# EAGLE board PCB v140 (EAGLE 9.7.0)
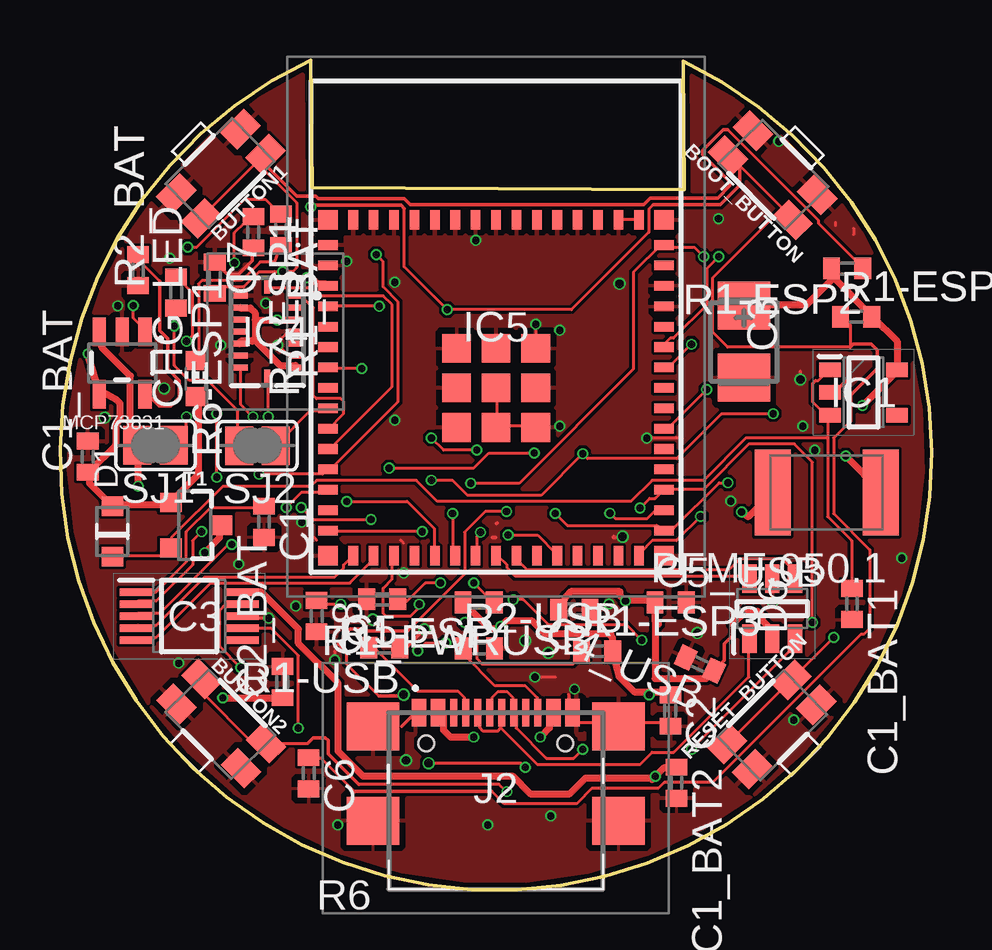
[diagram p0: board, top side]
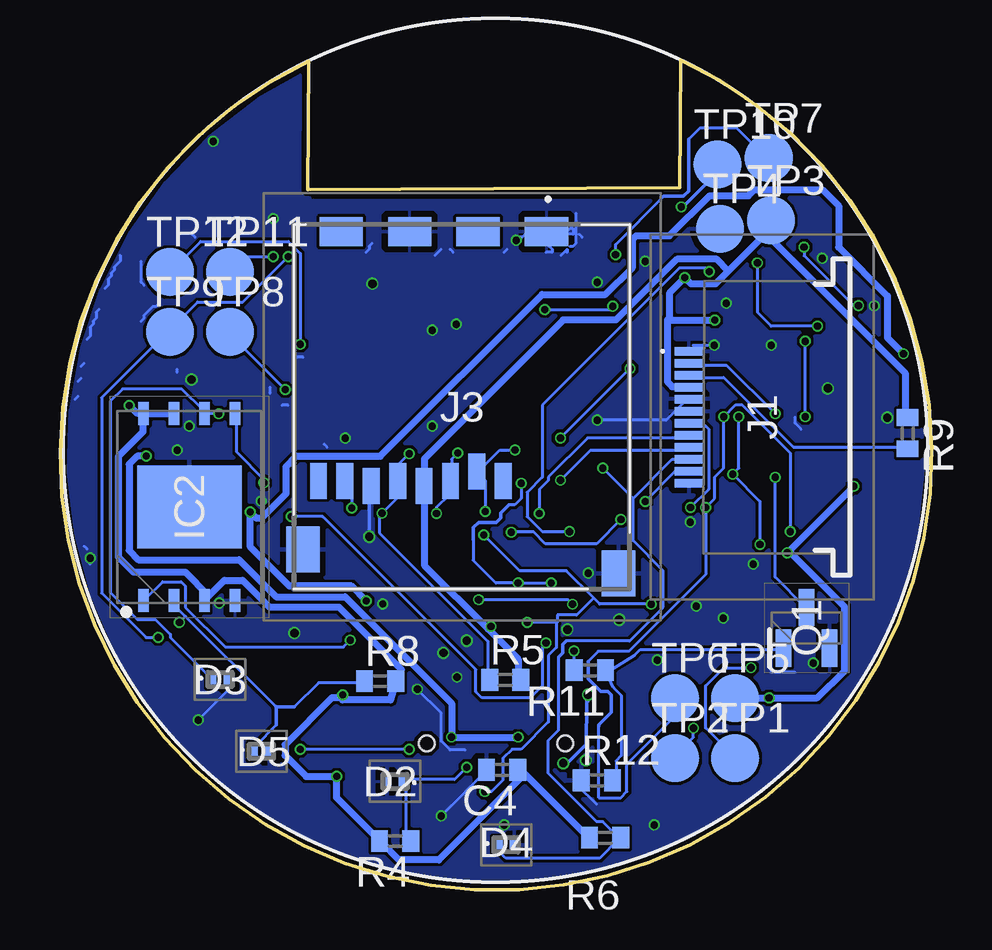
[diagram p1: board, bottom side, seen from below]

Size 36.33 x 34.59 mm. Coordinates in mm from the lower left corner, seen from the top.
Outline: 25.96,34.55 arc-309 10.46,34.59 10.51,29.27 26.01,29.19 25.96,34.55
Copper layers (1*16): Top / Bottom
Stack-up Default Layer Stack: Top User Defined 0.035mm / Dielectric-1 User Defined 1.6mm / Bottom User Defined 0.035mm
Design rules: minimum copper width 0.125mm, minimum drill size 0.3mm, copper clearance wire_polygon to wire_polygon 5mil, copper clearance wire_polygon to pad_smd 5mil, copper clearance wire_polygon to via 5mil, copper clearance pad_smd to pad_smd 5mil, copper clearance pad_smd to via 5mil, copper clearance via to via 5mil, copper clearance smd to pad (same net) 5mil, copper clearance smd to via (same net) 5mil, copper clearance smd to smd (same net) 5mil, dimension clearance 0.2mm, via restrict clearance 0mil, restrict clearance 0mil, drill distance 6mil, keepout clearance 0mil

## Footprints (pad centres in the part's own frame; a part is rotated, then mirrored left to right if it is on the bottom)
SPARKFUN-SWITCHES_TACTILE_SWITCH_SMD_4.6X2.8MM = smd 1.4 x 1: 1 -1.919,-0.571; 2 1.872,-0.571; 3 1.872,0.902; 4 -1.919,0.902
EAGLE-LTSPICE_C0402 = smd 0.7 x 0.9: 1 -0.65,0; 2 0.65,0
CT3528 = smd 2 x 2.2: + -1.5,0; - 1.5,0
ADAFRUIT_CHIP-LED0603 = smd 0.8 x 0.8: A 0,-0.75; C 0,0.75
AVX---SD0805S020S1R0_AVX_SD0805S020S1R0_0 = smd 0.8 x 0.9: 1 -1.05,0; 2 1.05,0
PESD5V0S1BL315 = smd 0.4 x 0.7: 1 -0.35,0; 2 0.35,0
SOT95P280X145-6N = smd 1.2 x 0.6: 1 -1.25,0.95; 2 -1.25,0; 3 -1.25,-0.95; 4 1.25,-0.95; 5 1.25,0; 6 1.25,0.95
SOT95P280X120-5N = smd 0.9 x 0.6: 1 -1.4,0.95; 2 -1.4,0; 3 -1.4,-0.95; 4 1.4,-0.95; 5 1.4,0.95
SON127P800X600X80-9N = smd 0.95 x 0.45: 1 -3.9,1.905; 2 -3.9,0.635; 3 -3.9,-0.635; 4 -3.9,-1.905; 5 3.9,-1.905; 6 3.9,-0.635; 7 3.9,0.635; 8 3.9,1.905 | smd 3.45 x 4.35: 9 0,0
SOP50P490X110-10N = smd 1.4 x 0.3: 1 -2.2,1; 2 -2.2,0.5; 3 -2.2,0; 4 -2.2,-0.5; 5 -2.2,-1; 6 2.2,-1; 7 2.2,-0.5; 8 2.2,0; 9 2.2,0.5; 10 2.2,1
BMI085 = smd 0.675 x 0.25: 1 1.165,1.5; 2 1.165,1; 3 1.165,0.5; 4 1.165,0; 5 1.165,-0.5; 6 1.165,-1; 7 1.165,-1.5; 9 -1.165,-1.5; 10 -1.165,-1; 11 -1.165,-0.5; 12 -1.165,0; 13 -1.165,0.5; 14 -1.165,1; 15 -1.165,1.5 | smd 0.25 x 0.675: 8 0,-1.915; 16 0,1.915
MY-ESP = smd 0.8 x 0.4: 1 -7,5.95; 2 -7,5.1; 3 -7,4.25; 4 -7,3.4; 5 -7,2.55; 6 -7,1.7; 7 -7,0.85; 8 -7,0; 9 -7,-0.85; 10 -7,-1.7; 11 -7,-2.55; 12 -7,-3.4; 13 -7,-4.25; 14 -7,-5.1; 15 -7,-5.95; 31 7,-5.95; 32 7,-5.1; 33 7,-4.25; 34 7,-3.4; 35 7,-2.55; 36 7,-1.7; 37 7,-0.85; 38 7,0; 39 7,0.85; 40 7,1.7; 41 7,2.55; 42 7,3.4; 43 7,4.25; 44 7,5.1; 45 7,5.95 | smd 0.4 x 0.8: 16 -5.95,-7; 17 -5.1,-7; 18 -4.25,-7; 19 -3.4,-7; 20 -2.55,-7; 21 -1.7,-7; 22 -0.85,-7; 23 0,-7; 24 0.85,-7; 25 1.7,-7; 26 2.55,-7; 27 3.4,-7; 28 4.25,-7; 29 5.1,-7; 30 5.95,-7; 46 5.95,7; 47 5.1,7; 48 4.25,7; 49 3.4,7; 50 2.55,7; 51 1.7,7; 52 0.85,7; 53 0,7; 54 -0.85,7; 55 -1.7,7; 56 -2.55,7; 57 -3.4,7; 58 -4.25,7; 59 -5.1,7; 60 -5.95,7 | smd 1.2 x 1.2: 61 0,0; 66 -1.65,1.65; 67 -1.65,0; 68 -1.65,-1.65; 69 0,-1.65; 70 1.65,-1.65; 71 1.65,0; 72 1.65,1.65; 73 0,1.65 | smd 0.8 x 0.8: 62 -7,7; 63 -7,-7; 64 7,-7; 65 7,7
PCA6LA12HL3TR = smd 0.35 x 1.2: 1 -2.75,-3.65; 2 -2.25,-3.65; 3 -1.75,-3.65; 4 -1.25,-3.65; 5 -0.75,-3.65; 6 -0.25,-3.65; 7 0.25,-3.65; 8 0.75,-3.65; 9 1.25,-3.65; 10 1.75,-3.65; 11 2.25,-3.65; 12 2.75,-3.65
MY-USB = smd 0.3 x 1.15: A1 -3.35,3.678; A4 -2.55,3.678; A5 -1.25,3.678; A6 -0.25,3.678; A7 0.25,3.678; A8 1.25,3.678; A9 2.55,3.678; A12 3.35,3.678; B1 3.05,3.678; B4 2.25,3.678; B5 1.75,3.678; B6 0.75,3.678; B7 -0.75,3.678; B8 -1.75,3.678; B9 -2.25,3.678; B12 -3.05,3.678 | smd 2.18 x 2: MP1 -5.11,-0.827; MP2 5.11,-0.827; MP3 -5.11,3.103; MP4 5.11,3.103 | hole 0.65: -2.89,2.403; 2.89,2.403
112ATAARR03ATTEND = smd 1.8 x 1.2: G1 10.6,10.4; G2 4.9,10.4; S1 7.75,10.4; S2 2.05,10.4 | smd 1.4 x 1.9: G3 13.6,-3.85; G4 0.45,-2.85 | smd 0.7 x 1.5: P1 8.8,0; P2 7.7,0.4; P3 6.6,0; P4 5.5,-0.2; P5 4.4,0; P6 3.3,-0.2; P7 2.2,0; P8 1.1,0
SPARKFUN-IC-POWER_SOT23-5 = smd 0.55 x 1.2: 1 -0.95,-1.3; 2 0,-1.3; 3 0.95,-1.3; 4 0.95,1.3; 5 -0.95,1.3
VARISTOR_CT/CN1812 = smd 1.5 x 3.6: 1 -2.25,0; 2 2.25,0
SOT96P240X120-3N = smd 1.55 x 0.65: 1 -0.85,0.96; 2 -0.85,-0.96; 3 0.85,0
EAGLE-LTSPICE_R0402 = smd 0.7 x 0.9: 1 -0.65,0; 2 0.65,0
SJ = smd 1.168 x 1.6: 1 -0.762,0; 2 0.762,0
SPARKFUN-DISCRETESEMI_SOT23-3 = smd 0.8 x 0.9: 1 -0.95,-1; 2 0.95,-1; 3 0,1.1
TP20R = smd 2 x 2: TP 0,0

## Placement (x,y rotation side)
BOOT_BUTTON  [SPARKFUN-SWITCHES_TACTILE_SWITCH_SMD_4.6X2.8MM]  29.79,29.91 135 top
BUTTON1  [SPARKFUN-SWITCHES_TACTILE_SWITCH_SMD_4.6X2.8MM]  6.57,29.95 225 top
BUTTON2  [SPARKFUN-SWITCHES_TACTILE_SWITCH_SMD_4.6X2.8MM]  6.62,6.79 315 top
C1  1uF  [EAGLE-LTSPICE_C0402]  8.5,15.34 270 top
C1_BAT  4.7uF  [EAGLE-LTSPICE_C0402]  1.16,18.05 90 top
C1_BAT1  4.7uF 0603  [EAGLE-LTSPICE_C0402]  33,11.91 270 top
C1_BAT2  4.7uF 0603  [EAGLE-LTSPICE_C0402]  25.68,4.46 270 top
C2  1uF  [EAGLE-LTSPICE_C0402]  25.43,7.47 270 top
C2_BAT  4.7uF  [EAGLE-LTSPICE_C0402]  9.27,8.66 90 top
C3  100uF TANT C  [CT3528]  28.5,22.84 270 top
C4  100nF  [EAGLE-LTSPICE_C0402]  17.91,5 180 bottom
C4_USB  100nF  [EAGLE-LTSPICE_C0402]  26.66,9.41 155 top
C5  1uF  [EAGLE-LTSPICE_C0402]  13.43,12.11 180 top
C5_USB  4.7 uF 0603  [EAGLE-LTSPICE_C0402]  25.45,11.98 0 top
C6  100nF  [EAGLE-LTSPICE_C0402]  10.36,4.86 270 top
C7  100nF  [EAGLE-LTSPICE_C0402]  6.45,25.51 90 top
C8  100nF  [EAGLE-LTSPICE_C0402]  10.69,11.41 270 top
CHG_LED  [ADAFRUIT_CHIP-LED0603]  5.65,21.31 0 top
D1  AVX---SD0805S020S1R0_AVX_SD0805S020S1R0AVX_SD0805S020S1R0_0_0  [AVX---SD0805S020S1R0_AVX_SD0805S020S1R0_0]  2.18,14.94 90 top
D2  PESD3V3S1BLYL  [PESD5V0S1BL315]  22.36,4.51 180 bottom
D3  PESD3V3S1BLYL  [PESD5V0S1BL315]  29.66,8.77 0 bottom
D4  PESD3V3S1BLYL  [PESD5V0S1BL315]  17.73,1.88 0 bottom
D5  PESD3V3S1BLYL  [PESD5V0S1BL315]  27.94,5.77 0 bottom
D6  USBLC6-2SC6Y  [SOT95P280X145-6N]  29.68,11.72 90 top
IC1  XC6220A331MR-G  [SOT95P280X120-5N]  33.48,20.73 0 top
IC2  W25Q256JVEIQ  [SON127P800X600X80-9N]  30.94,15.96 90 bottom
IC3  DRV2605LDGST  [SOP50P490X110-10N]  5.38,11.41 0 top
IC4  BMI085  [BMI085]  8.64,23.27 0 top
IC5  ESP32-S3-MINI-1-N8  [MY-ESP]  18.17,20.92 0 top
J1  MY_LCD  [PCA6LA12HL3TR]  6.47,19.7 270 bottom
J2  USB4110-GF-A  [MY-USB]  18.16,3.7 0 top
J3  112A-TAAR-R03_ATTEND  [112ATAARR03ATTEND]  26.66,17.04 0 bottom
MCP73831  SPARKFUN-IC-POWER_MCP73831  [SPARKFUN-IC-POWER_SOT23-5]  2.59,21.96 180 top
PFMF.050.1  500mA  [VARISTOR_CT/CN1812]  31.94,16.56 180 top
Q1  2N7002  [SOT96P240X120-3N]  5.22,10.92 90 bottom
R1-ESP  10K  [EAGLE-LTSPICE_R0402]  17.44,11.98 180 top
R1-ESP1  10K  [EAGLE-LTSPICE_R0402]  33.17,23.89 0 top
R1-ESP2  10K  [EAGLE-LTSPICE_R0402]  32.8,25.9 180 top
R1-ESP3  10K  [EAGLE-LTSPICE_R0402]  22.38,9.94 0 top
R1-USB  5K1  [EAGLE-LTSPICE_R0402]  13.51,10.1 179.6 top
R1_BAT  200  [EAGLE-LTSPICE_R0402]  9.2,27.51 270 top
R1_PWRUSB  100K  [EAGLE-LTSPICE_R0402]  21.43,11.68 180 top
R2-USB  5K1  [EAGLE-LTSPICE_R0402]  17.46,10.06 0 top
R2_BAT  2K  [EAGLE-LTSPICE_R0402]  3.25,25.83 90 top
R4  10K  [EAGLE-LTSPICE_R0402]  22.36,2.03 180 bottom
R5  10K  [EAGLE-LTSPICE_R0402]  17.78,8.75 0 bottom
R6  10K  [EAGLE-LTSPICE_R0402]  13.61,2.17 180 bottom
R6-ESP1  100K  [EAGLE-LTSPICE_R0402]  4.84,24.9 270 top
R7-ESP1  100K  [EAGLE-LTSPICE_R0402]  8.06,27.4 270 top
R8  10K  [EAGLE-LTSPICE_R0402]  22.99,8.69 0 bottom
R9  22  [EAGLE-LTSPICE_R0402]  1.01,19.03 270 bottom
R11  10K  [EAGLE-LTSPICE_R0402]  14.25,9.15 180 bottom
R12  10K  [EAGLE-LTSPICE_R0402]  13.96,4.56 0 bottom
RESET_BUTTON  [SPARKFUN-SWITCHES_TACTILE_SWITCH_SMD_4.6X2.8MM]  29.78,6.79 45 top
SJ1  [SJ]  3.98,18.53 180 top
SJ2  [SJ]  8.22,18.51 180 top
T1  20V/4.2A/52mΩ/1.4W  [SPARKFUN-DISCRETESEMI_SOT23-3]  5.62,15.2 270 top
TP1  TPTP20R  [TP20R]  8.2,5.49 0 bottom
TP2  TPTP20R  [TP20R]  10.7,5.49 0 bottom
TP3  TPTP20R  [TP20R]  6.71,27.9 0 bottom
TP4  TPTP20R  [TP20R]  8.83,27.55 0 bottom
TP5  TPTP20R  [TP20R]  8.2,7.99 0 bottom
TP6  TPTP20R  [TP20R]  10.7,7.99 0 bottom
TP7  TPTP20R  [TP20R]  6.8,30.5 0 bottom
TP8  TPTP20R  [TP20R]  29.24,23.25 0 bottom
TP9  TPTP20R  [TP20R]  31.74,23.25 0 bottom
TP10  TPTP20R  [TP20R]  8.93,30.24 0 bottom
TP11  TPTP20R  [TP20R]  29.24,25.75 0 bottom
TP12  TPTP20R  [TP20R]  31.74,25.75 0 bottom

## Library data of the parts
BOOT_BUTTON BUTTON1 BUTTON2 RESET_BUTTON = ButtonSideways; PROD_ID: SWCH-14139; SF_SKU: COM-08720
C1 C1_BAT C1_BAT1 C1_BAT2 C2 C2_BAT C4 C4_USB C5 C5_USB C6-C8 = Library; SPICEMODEL: NONE; SPICEPREFIX: C
C3 = Library; SPICEPREFIX: C
CHG_LED PFMF.050.1 SJ1 SJ2 TP1-TP12 = Library
D1 = Library; CENTROID_NOT_SPECIFIED: No; DATASHEET: http://datasheets.avx.com/schottky.pdf; DIGIKEY_DESCRIPTION: DIODE SCHOTTKY 20V 1A 0805; DIGIKEY_PART_NUMBER: 478-7800-1-ND; LEAD_FREE: yes; MF: AVX; MOUSER_PART_NUMBER: 581-SD0805S020S1R0; MPN: SD0805S020S1R0; PACKAGE: 0805 (2012 metric); PREFIX: D; ROHS: yes; TEMPERATURE_RANGE_HIGH: +125°C; TEMPERATURE_RANGE_LOW: -55°C
D2-D5 = Library; ARROW_PART_NUMBER: PESD3V3S1BLYL; ARROW_PRICE-STOCK: https://www.arrow.com/en/products/pesd3v3s1blyl/nexperia?region=nac; DESCRIPTION: PESD3V3S1BL - Low capacitance bidirectional ESD protection diode; HEIGHT: 0mm; MANUFACTURER_NAME: Nexperia; MANUFACTURER_PART_NUMBER: PESD3V3S1BLYL; MOUSER_PART_NUMBER: 771-PESD3V3S1BLYL; MOUSER_PRICE-STOCK: https://www.mouser.co.uk/ProductDetail/Nexperia/PESD3V3S1BLYL?qs=vLWxofP3U2zWoKHYJMVoKQ%3D%3D
D6 = Library; ARROW_PART_NUMBER: USBLC6-2SC6Y; ARROW_PRICE-STOCK: https://www.arrow.com/en/products/usblc6-2sc6y/stmicroelectronics?region=nac; DESCRIPTION: Low Cap. ESD Protection Auto SOT-23-6 STMicroelectronics USBLC6-2SC6Y, Dual Uni-Directional TVS Diode Array, 6-Pin SOT-23; HEIGHT: 1.45mm; MANUFACTURER_NAME: STMicroelectronics; MANUFACTURER_PART_NUMBER: USBLC6-2SC6Y; MOUSER_PART_NUMBER: 511-USBLC6-2SC6Y; MOUSER_PRICE-STOCK: https://www.mouser.co.uk/ProductDetail/STMicroelectronics/USBLC6-2SC6Y?qs=gNDSiZmRJS%2FOgDexvXkdow%3D%3D
IC1 = Library; DESCRIPTION: LDO Voltage Regulators; HEIGHT: 1.2mm; MANUFACTURER_NAME: Torex; MANUFACTURER_PART_NUMBER: XC6220A331MR-G; MOUSER_PART_NUMBER: 865-XC6220A331MR-G; MOUSER_PRICE-STOCK: https://www.mouser.co.uk/ProductDetail/Torex-Semiconductor/XC6220A331MR-G?qs=AsjdqWjXhJ8ZSWznL1J0gg%3D%3D
IC2 = Library; ARROW_PART_NUMBER: W25Q256JVEIQ; ARROW_PRICE-STOCK: https://www.arrow.com/en/products/w25q256jveiq/winbond-electronics?region=nac; DESCRIPTION: 256M-bit Serial Flash Memory with uniform 4KB sectors and Dual/Quad SPI; HEIGHT: 0.8mm; MANUFACTURER_NAME: Winbond; MANUFACTURER_PART_NUMBER: W25Q256JVEIQ; MOUSER_PART_NUMBER: 454-W25Q256JVEIQ; MOUSER_PRICE-STOCK: https://www.mouser.co.uk/ProductDetail/Winbond/W25Q256JVEIQ?qs=qSfuJ%252Bfl%2Fd4o%2FNFUf7yCgA%3D%3D
IC3 = Library; ARROW_PART_NUMBER: DRV2605LDGST; ARROW_PRICE-STOCK: https://www.arrow.com/en/products/drv2605ldgst/texas-instruments?region=nac; DESCRIPTION: ERM & LRA Device Haptic Driver 2-5V BGA9 Texas Instruments DRV2605LDGST Piezo Haptic Motor Driver IC, 5 V, 10-Pin VSSOP; HEIGHT: 1.1mm; MANUFACTURER_NAME: Texas Instruments; MANUFACTURER_PART_NUMBER: DRV2605LDGST; MOUSER_PART_NUMBER: 595-DRV2605LDGST; MOUSER_PRICE-STOCK: https://www.mouser.co.uk/ProductDetail/Texas-Instruments/DRV2605LDGST?qs=asCBFxFfL1TjvcNdZsR2BA%3D%3D
IC4 = Library; ARROW_PART_NUMBER: BMI085; ARROW_PRICE-STOCK: https://www.arrow.com/en/products/bmi085/bosch; DESCRIPTION: IMUs - Inertial Measurement Units High-performance IMU BMI085 for virtual and augmented reality applications; HEIGHT: 1mm; MANUFACTURER_NAME: BOSCH; MANUFACTURER_PART_NUMBER: BMI085; MOUSER_PART_NUMBER: 262-BMI085; MOUSER_PRICE-STOCK: https://www.mouser.co.uk/ProductDetail/Bosch-Sensortec/BMI085?qs=y6ZabgHbY%252ByGCM8LfWZyqA%3D%3D
IC5 = Library; DESCRIPTION: WiFi Development Tools - 802.11 [Engineering Samples] SMD Module, ESP32-S3FN8, 8 MB SPI Flash, PCB Antenna; HEIGHT: 2.55mm; MANUFACTURER_NAME: Espressif Systems; MANUFACTURER_PART_NUMBER: ESP32-S3-MINI-1-N8; MOUSER_PART_NUMBER: 356-ESP32-S3-MINI1N8; MOUSER_PRICE-STOCK: https://www.mouser.co.uk/ProductDetail/Espressif-Systems/ESP32-S3-MINI-1-N8?qs=XAiT9M5g4x82rl6F%2FIYUQg%3D%3D
J1 = LCD_CORRECT
J2 = Library; DESCRIPTION: CONN USB 2.0 TYPE-C R/A SMT; HEIGHT: 3.26mm; MANUFACTURER_NAME: GCT (GLOBAL CONNECTOR TECHNOLOGY); MANUFACTURER_PART_NUMBER: USB4110-GF-A; MOUSER_PART_NUMBER: 640-USB4110-GF-A; MOUSER_PRICE-STOCK: https://www.mouser.co.uk/ProductDetail/GCT/USB4110-GF-A?qs=KUoIvG%2F9IlYiZvIXQjyJeA%3D%3D
J3 = Library; DESCRIPTION: Micro SD Card Socket, Push-Push Type, Top Mount, SMT, H=1.83mm, 10u; HEIGHT: 1.9mm; MANUFACTURER_NAME: ATTEND; MANUFACTURER_PART_NUMBER: 112A-TAAR-R03 ATTEND
MCP73831 = Library; PROD_ID: IC-09995
Q1 = Library; ARROW_PART_NUMBER: 2N7002; ARROW_PRICE-STOCK: https://www.arrow.com/en/products/2n7002/on-semiconductor?region=europe; DESCRIPTION: N-channel MOSFET,2N7002 0.115A 60V; HEIGHT: 1.2mm; MANUFACTURER_NAME: onsemi; MANUFACTURER_PART_NUMBER: 2N7002; MOUSER_PART_NUMBER: 512-2N7002; MOUSER_PRICE-STOCK: https://www.mouser.co.uk/ProductDetail/onsemi-Fairchild/2N7002?qs=0dwsXDNhqlz66WJJhrTFjQ%3D%3D
R1-ESP R1-ESP1-R1-ESP3 R1-USB R1_BAT R1_PWRUSB R2-USB R2_BAT R4-R6 R6-ESP1 R7-ESP1 R8 R9 R11 R12 = Library; SPICEMODEL: NONE; SPICEPREFIX: R
T1 = Library; PROD_ID: TRAN-14388

## Nets
3V3: C1_BAT2.1 C2.1 C3.+ C4.1 IC1.5 IC2.3 IC2.7 IC2.8 IC3.10 IC4.3 IC4.7 IC4.11 IC4.14 IC5.3 J1.4 J3.P4 R1-ESP1.2 R1-ESP2.2 R1-ESP3.2 R1-ESP.2 R4.2 R5.2 R6.2 R8.2 R9.1 TP3.TP
ADC_BAT: IC5.9 SJ2.1
BOOT: BOOT_BUTTON.3 BOOT_BUTTON.4 C6.1 IC5.4 R1-ESP1.1 TP10.TP
BUTTON1: BUTTON1.3 BUTTON1.4 C7.1 IC5.15 R1-ESP2.1
BUTTON2: BUTTON2.3 BUTTON2.4 C8.1 IC5.26 R1-ESP3.1
D+: D6.4 IC5.24
D-: D6.6 IC5.23
DISP_RST: IC5.20 J1.11
DN: D6.1 J2.A7 J2.B7
DP: D6.3 J2.A6 J2.B6
EN_DRV: IC3.5 IC5.17
GND: BOOT_BUTTON.1 BOOT_BUTTON.2 BUTTON1.1 BUTTON1.2 BUTTON2.1 BUTTON2.2 C1.2 C1_BAT1.2 C1_BAT2.2 C1_BAT.2 C2.2 C2_BAT.2 C3.- C4.2 C4_USB.2 C5.2 C5_USB.2 C6.2 C7.2 C8.2 D2.2 D3.2 D4.2 D5.2 D6.5 IC1.2 IC2.4 IC2.9 IC3.8 IC4.4 IC4.6 IC4.10 IC4.15 IC5.1 IC5.2 IC5.42 IC5.43 IC5.46 IC5.47 IC5.48 IC5.49 IC5.50 IC5.51 IC5.52 IC5.53 IC5.54 IC5.55 IC5.56 IC5.57 IC5.58 IC5.59 IC5.60 IC5.61 IC5.62 IC5.63 IC5.64 IC5.65 IC5.66 IC5.67 IC5.68 IC5.69 IC5.70 IC5.71 IC5.72 IC5.73 J1.1 J1.5 J1.6 J1.12 J2.A1 J2.A12 J2.B1 J2.B12 J2.MP1 J2.MP2 J2.MP3 J2.MP4 J3.G1 J3.G2 J3.G3 J3.G4 J3.P6 MCP73831.2 Q1.2 R1-USB.1 R1_PWRUSB.1 R2-USB.2 R2_BAT.1 R7-ESP1.2 R12.1 RESET_BUTTON.1 RESET_BUTTON.2 TP4.TP
IMU_INT1: IC4.16 IC5.11
IMU_INT2: IC4.1 IC5.10
IN_DRV: IC3.4 IC5.16
LEDA: J1.3 R9.2
LEDK: J1.2 Q1.3
MISO: D5.1 IC2.2 IC5.33 J3.P7 R8.1
MOSI: D4.1 IC2.5 IC5.31 J1.10 J3.P3 R6.1
N$1: J2.A5 R1-USB.2
N$2: C1_BAT1.1 D1.1 IC1.1 IC1.3 T1.2
N$3: Q1.1 R11.1 R12.2
N$4: R6-ESP1.2 R7-ESP1.1 SJ2.2
N$5: J2.B5 R2-USB.1
N$6: R6-ESP1.1 SJ1.1
N$7: MCP73831.1 R1_BAT.1
N$8: C1.1 IC3.1
N$9: CHG_LED.C R1_BAT.2
N$10: MCP73831.5 R2_BAT.2
PIN_LED: IC5.30 R11.2
PPG_INT: IC5.36 TP8.TP
RESET: C5.1 IC5.45 R1-ESP.1 RESET_BUTTON.3 RESET_BUTTON.4 TP9.TP
RX: IC5.40 TP11.TP
SCK: D3.1 IC2.6 IC5.32 J1.9 J3.P5 R5.1
SCL: IC3.2 IC4.8 IC5.13 TP6.TP
SDA: IC3.3 IC4.9 IC5.12 TP7.TP
SS_FLASH: IC2.1 IC5.18
SS_SD: D2.1 IC5.7 J3.P2 R4.1
SS_TFT: IC5.21 J1.8
TFT_DC: IC5.22 J1.7
TX: IC5.39 TP12.TP
VBAT: C2_BAT.1 MCP73831.3 SJ1.2 T1.3 TP5.TP
VBUS: C1_BAT.1 C4_USB.1 C5_USB.1 CHG_LED.A D1.2 D6.2 MCP73831.4 PFMF.050.1.2 R1_PWRUSB.2 T1.1
VIBE_OUT+: IC3.9 TP1.TP
VIBE_OUT-: IC3.7 TP2.TP
VUSB: J2.A4 J2.A9 J2.B4 J2.B9 PFMF.050.1.1

## Tracks (layer width: path | path; a pad name or v marks a point on that pad's centre or on a via)
3V3  (via drill 0.3)
  Top 0.152: 24.61,4.66 24.67,4.6
  Top 0.3: 24.55,8.25 23.92,8.25 23.31,8.85 R1-ESP3.2 23.03,10.5 22.92,10.6 | 24.55,8.25 25.26,8.25 C2.1 | R1-ESP.2 16.86,11.9 17.9,10.87 18.37,10.87 v18.37,10.98 18.61,11.22 19.66,11.22 20.2,10.68 22.84,10.68 22.92,10.6 | 22.97,10.65 22.92,10.6 | 8.13,23.75 8.13,24.06 7.94,24.25 7.54,24.25 IC4.14 | 8.13,23.75 8.13,22.9 | IC4.11 7.54,22.87 8.02,22.87 8.09,22.94 8.13,22.9 | 8.13,22.9 9.18,21.86 9.81,21.86 IC4.7 | 8.13,23.75 v9.05,23.75 9.81,23.75 IC4.3 | v10.29,25.52 10.47,25.52 10.73,25.26 11.07,25.26 IC5.3 | C1_BAT2.1 25.68,5.1 25.18,5.1 v24.8,4.72 24.67,4.6 | IC3.10 8.39,12.41 9.93,10.87 9.93,10.27 11.59,8.61 11.59,5.77 12.62,4.74 18.86,4.74 19.59,4.01 21.24,4.01 21.9,4.66 24.61,4.66 | 32.23,25.51 32.23,25.89 R1-ESP2.2 32.23,25.51 | 32.23,25.51 33.75,24 R1-ESP1.2 33.87,23.87 34.88,22.87 IC1.5 34.86,21.61 | 32.23,25.51 31.1,24.38 28.58,24.38 C3.+ | 34.86,21.61 | v33.44,20.19 34.86,21.61 | v24.55,8.12 24.55,8.25
  Bottom 0.3: 18.49,10.86 21.15,13.52 21.15,16.65 J3.P4 21.15,16.84 21.15,17.96 15.36,23.75 13.16,23.75 10.63,26.28 8.96,26.28 8.47,25.8 | 18.49,10.86 17.24,9.61 17.24,8.75 R5.2 | 18.49,10.86 v18.37,10.98 | 6.92,27.35 8.47,25.8 | 8.47,25.8 9.01,25.26 10.04,25.26 v10.29,25.52 10.94,24.87 10.94,23.75 | TP3.TP 6.94,27.87 7.19,27.62 6.92,27.35 | 6.92,27.35 1.11,21.55 1.11,19.77 R9.1 | J1.4 10.18,20.98 10.82,20.98 11.02,21.18 11.02,23.75 10.94,23.75 | 10.94,23.75 v9.05,23.75 | 17.11,4.97 17.24,5.1 C4.1 17.11,4.97 | 17.11,4.97 16.96,4.82 | 16.96,4.82 14.34,2.2 R6.2 | 16.96,4.82 20.54,1.25 22.2,1.25 22.91,1.95 R4.2 23.04,2.08 24.8,3.84 v24.8,4.72 26.07,4.72 26.95,5.6 26.95,6.05 25,8 24.55,8 | IC2.7 31.6,19.84 32.74,19.84 IC2.8 | 30.12,12.26 30.22,12.16 IC2.3 | 30.12,12.26 29.48,12.9 28.71,12.9 27.6,11.78 24.71,11.78 22.11,9.18 R8.2 22.56,7.91 24.55,7.91 24.55,8 | 30.12,12.26 31.09,13.23 33.26,13.23 33.88,13.85 33.88,18.07 32.86,19.09 32.86,19.84 IC2.8 | v33.44,20.19 33.1,19.86 IC2.8 | 24.55,8 v24.55,8.12
ADC_BAT
  Top 0.125: IC5.9 11.07,19.97 10.44,19.97 9.05,18.58 SJ2.1
BOOT  (via drill 0.3)
  Top 0.125: v13.3,24.33 IC5.4 | 27.82,30.55 BOOT_BUTTON.3 27.95,30.55 28.31,30.19 30.09,28.41 | 30.09,28.41 30.47,28.03 BOOT_BUTTON.4 30.09,28.41 | v10.44,28.46 10.51,28.53 | 14.34,28.4 14.34,25.97 v16.13,24.19 21.31,24.19 24.53,27.41 24.53,28.38 24.71,28.55 | 12.28,4.09 10.89,5.48 10.44,5.48 C6.1 | 17.99,4.1 18.5,3.59 21.52,3.59 22.15,4.22 24.93,4.22 25.18,4.47 27.19,4.47 33.37,10.64 33.49,10.64 33.75,10.9 33.75,14.17 32.23,15.68 32.23,18.83 32.95,19.55 | R1-ESP1.1 32.61,23.87 32.93,23.56 32.93,22.62 27.82,22.62 27.19,23.24 27.19,25.51 30.09,28.41
  Top 0.152: 17.99,4.1 12.28,4.1 12.28,4.09 | 32.95,19.55 32.95,20.62 32.94,20.62 34.05,21.73 34.05,22.49 33.79,22.74 33.05,22.74 32.93,22.62 | 24.71,28.55 27.52,28.55 28.33,29.37 28.33,30.17 28.31,30.19 | v10.44,28.46 10.51,28.53 14.21,28.53 14.34,28.4
  Bottom 0.125: v16.13,24.19 13.44,24.19 v13.3,24.33 | 8.93,30.29 8.93,30.28 TP10.TP
  Bottom 0.152: v10.44,28.46 10.37,28.46 8.93,29.91 8.93,30.29
BUTTON1  (via drill 0.3)
  Top 0.125: v15.1,14.93 11.19,14.93 IC5.15 | C7.1 6.51,24.87 6.78,25.13 7.66,25.13 8.29,25.76 8.92,25.76 8.93,25.77 v9.28,25.77 9.69,25.77 9.86,25.94 9.86,28.63 8.56,29.93 BUTTON1.4 8.55,30.68 5.9,28.03 BUTTON1.3 | 27.82,31.69 31.6,27.91 31.6,27.78 33.37,26.02 R1-ESP2.1
  Top 0.152: BUTTON1.4 8.56,30.21 9.86,28.91 10.67,28.91 10.76,28.81 14.34,28.81 14.59,28.56 24.32,28.56 24.59,28.83 27.4,28.83 27.91,29.35 27.91,29.52 26.78,30.65 26.78,30.83 27.63,31.69 27.82,31.69
  Bottom 0.125: v15.1,14.93 16.23,14.93 16.86,15.56 16.86,16.57 16.23,17.2 16.23,20.2 10.49,25.94 9.44,25.94 v9.28,25.77
BUTTON2  (via drill 0.3)
  Top 0.125: BUTTON2.4 5.9,8.75 5.9,8.25 8.04,6.11 8.55,6.11 BUTTON2.3 8.67,6.11 10.32,6.11 | v18.67,14.79 19.9,14.79 20.64,14.05 IC5.26 | v11.7,11.9 10.94,11.9 10.81,12.03 C8.1 | v16.86,11.15 17.37,10.64 17.37,9.64 17.59,9.41 21.37,9.41 R1-ESP3.1 | 12.47,4.4 18.29,4.4 18.6,4.09 v18.63,4.09
  Top 0.152: 10.32,6.11 10.55,6.34 11.06,6.34 11.18,6.22 11.18,5.66 12.44,4.4 12.47,4.4
  Bottom 0.125: v18.67,14.79 17.17,13.29 15.22,13.29 14.09,12.16 | 14.09,12.16 13.84,11.9 v11.7,11.9 | 15.65,11.15 15.6,11.15 15.6,11.45 14.8,11.45 14.09,12.16 | 15.65,11.15 v16.86,11.15 | v18.63,4.09 18.34,4.09 17.87,4.56 17.87,5.48 17.49,5.86 17.11,5.86 15.98,6.99 15.98,9.76 15.65,10.09 15.65,11.15
D+
  Top 0.125: IC5.24 19.13,13.92 19.13,13.67 19.47,13.33 27.86,13.33 28.33,13.79 30.09,13.79 30.6,13.29 30.6,13.04 D6.4
D-
  Top 0.125: IC5.23 18.25,13.92 18.63,13.54 18.63,13.42 18.97,13.07 28.7,13.07 D6.6
DISP_RST  (via drill 0.3)
  Top 0.125: v11.95,16.19 14.47,16.19 15.6,15.05 15.6,14.05 IC5.20
  Bottom 0.125: v11.95,16.19 10.69,17.45 10.18,17.45 J1.11
DN
  Top 0.125: 18.37,6.74 18.25,6.61 17.62,6.61 17.49,6.74 17.49,7.37 J2.B7 | 18.37,6.74 18.37,7.37 J2.A7 | 18.37,6.74 19.89,5.23 24.17,5.23 24.67,5.73 25.57,5.73 28.71,8.87 28.71,10.39 D6.1
DP  (via drill 0.3)
  Top 0.125: J2.A6 18,7.49 18,8 18.25,8.25 18.63,8.25 18.88,8 18.88,7.49 J2.B6 19,7.37 19,6.74 20.26,5.48 21.4,5.48 v21.78,5.86 | v26.31,5.86 30.6,10.14 30.6,10.39 D6.3
  Bottom 0.125: v21.78,5.86 v26.31,5.86
EN_DRV
  Top 0.125: IC5.17 12.96,13.92 12.96,13.67 12.07,12.79 6.28,12.79 4.01,10.52 3.25,10.52 IC3.5
GND  (via drill 0.3, 0.35)
  Top 0.125: 9.2,22.57 9.2,22.7 v9.07,22.7 | 9.45,23.2 9.2,22.95 | 9.7,22.32 IC4.6 | 7.45,22.32 7.07,22.32 | 18.2,19.32 18.2,20.82 IC5.61 | 19.82,19.32 IC5.70 19.7,19.32 18.2,19.32 | 18.2,19.32 IC5.69 | IC5.46 24.07,27.95 23.32,27.95 IC5.47 | 17.32,27.82 IC5.54 | v19.82,23.57 IC5.72 | 32.32,27.7 32.32,27.82 | 33.07,27.57 33.07,27.32 | 25.95,18.82 v24.45,18.82 | 28.45,21.32 C3.- | 31.57,7.82 31.57,8.2 | 21.2,8.12 21.2,7.95 | 21.2,7.45 J2.B1 21.2,7.32 | 21.57,6.95 25.29,6.95 C2.2 | 11.45,9.95 v11.45,9.57 | v30.95,19.32 30.82,19.45 | 25.2,13.95 IC5.64 | v19.79,8.86 20.65,8.86 | v8.7,11.32 7.7,11.32 IC3.8 | 8.45,14.57 C1.2 | 10.7,14.57 10.57,14.7 | 14.32,14.45 14.2,14.57 | 11.2,26.95 IC5.1 | J2.B12 15.07,7.45 14.82,7.45 J2.A1
  Top 0.152: 15.11,10.77 v15.18,10.85 14.43,10.09 R1-USB.1 | 14.23,6.8 J2.A1 | v30.85,21.27 30.85,21.61 | 32.77,21.23 32.28,20.73 IC1.2 | C7.2 6.47,26.16 6.96,25.67 7.45,25.67 8.01,26.23 8.01,26.7 R7-ESP1.2 | 18.02,14.69 18.15,14.69 | 18.18,15.26 18.21,15.29 | 23.17,14.68 23.05,14.68 23.08,14.72 | IC4.6 9.5,22.27 v9.07,22.7
  Bottom 0.125: 9.95,22.7 v9.07,22.7 | 5.7,19.7 5.7,19.45 5.45,19.2 | 14.82,28.2 14.82,26.95 14.95,26.82 15.07,26.82 | 15.45,26.45 15.2,26.7 15.2,26.57 | 26.2,22.2 26.45,22.2 | 32.95,26.2 32.95,25.32 32.82,25.2 | 32.2,24.45 32.32,24.32 32.45,24.32 32.82,23.95 32.82,23.82 32.95,23.7 | 35.2,13.7 35.07,13.57 | 35.32,14.32 35.2,14.2 | 35.57,20.57 35.7,20.45 | 35.45,21.32 35.57,21.2 | 35.32,21.95 35.45,21.82 | 35.2,22.95 35.07,23.07 35.07,23.45 34.95,23.57 34.95,23.7 34.82,23.82 34.82,24.07 34.7,24.2 | 34.45,25.07 34.32,25.2 34.32,25.45 34.2,25.57 34.2,25.7 34.07,25.82 34.07,25.95 33.82,26.2 33.82,26.45 | 14.7,27.32 14.57,27.2 | 17.2,27.2 17.07,27.2 16.82,27.45 | 15.95,27.7 16.2,27.45 | 15.7,27.32 14.95,27.32 14.95,27.57 15.07,27.57 15.2,27.45 15.7,27.45 | 16.07,26.57 15.82,26.57 15.82,26.7 15.95,26.82 15.95,27.07 16.2,27.32 | 20.7,26.45 20.45,26.7 | 21.7,27.07 21.95,27.32 | 21.57,27.57 21.57,27.45 21.45,27.32 | 25.2,18.45 25.32,18.57 | 30.82,27.32 30.7,27.2 | 19.95,26.57 20.07,26.7 | 17.7,26.7 17.82,26.57 | 31.45,21.57 31.45,21.7 | 27.57,20.7 27.57,20.95 | 26.82,20.2 27.07,20.2 | 23.57,26.57 23.45,26.7 23.45,26.82 23.32,26.95 | 29.32,8.32 v30.57,7.07 | 18.57,4.95 v20.45,3.07 | 13.98,3.57 14.77,4.36 R12.1 | 19.45,5.82 20.07,5.82 20.45,6.2 20.45,7.37 v21.43,8.36 | 6.7,9.07 5.7,9.07 | 19.89,8.86 v19.79,8.86 | 13.07,13.2 J3.G3 | v13.95,19.57 11.07,19.57 10.2,20.45 J1.5
  Bottom 0.152: J3.P6 23.44,16.75 v23.44,14.72
  other vias: 29.7,11.95 6.7,22.7 8.57,24.45 2.4,24.34 4.57,26.32 20.82,19.32 17.32,27.07 29.95,31.2 27.44,27.97 35.07,13.82 17.82,2.7 11.57,2.7 4.95,9.45 27.95,16.2 31.45,18.32 9.82,11.82 7.45,13.57 10.07,15.32 14.32,13.2 20.82,23.32 13.95,25.32 11.95,26.2 4.34,20.9 1.86,19.68 23.31,25.26 13.03,11.26 19.38,10.38 22.87,11.91 20.35,9.87 14.42,5.39 26.56,10.7
  pour Bottom: -16.9,-17.66 52.05,-17.66 52.05,51.77 25.86,51.77 25.86,28.79 10.48,28.79 10.48,51.96 -16.37,51.96 -16.37,49.06
  pour Top: 48.65,-15.24 48.65,49.67 25.87,49.67 25.87,28.81 10.47,28.81 10.47,49.63 -13.12,49.63 -13.12,-15.3 -7.16,-15.3
IMU_INT1
  Top 0.125: IC4.16 8.7,25.09 10.36,25.09 10.69,24.76 13.47,24.76 13.84,24.39 13.84,20.98 11.19,18.33 IC5.11
IMU_INT2
  Top 0.125: IC4.1 9.93,24.76 10.06,24.76 10.56,24.25 10.56,20.6 10.69,20.47 11.7,20.47 11.82,20.35 11.82,19.84 11.19,19.21 IC5.10
IN_DRV
  Top 0.125: IC5.16 12.2,13.92 11.82,13.54 11.82,13.42 11.44,13.04 6.03,13.04 4.01,11.02 3.25,11.02 IC3.4
LEDA
  Bottom 0.125: R9.2 1.04,18.46 5.77,18.46 8.67,21.35 10.06,21.35 J1.3
LEDK  (via drill 0.3)
  Top 0.125: v6.53,17.2 v6.53,19.84
  Bottom 0.125: v6.53,19.84 8.55,21.86 10.06,21.86 J1.2 | v6.53,17.2 6.53,13.04 5.27,11.78 Q1.3
MISO  (via drill 0.3)
  Top 0.125: v24.17,15.92 24.56,16.31 24.8,16.31 25.05,16.57 IC5.33 25.18,16.69 26.82,16.69 28.71,18.58 30.6,18.58 31.35,17.83 v31.35,11.15
  Bottom 0.125: v24.17,15.92 24.17,16.69 24.41,16.93 J3.P7 | 26.56,7.63 25.56,8.63 23.73,8.63 R8.1 | 27.32,6.87 28.2,5.98 28.2,5.86 D5.1 | 27.34,7.64 31.1,11.4 | 31.1,11.4 31.48,11.78 31.48,12.03 IC2.2 | 31.1,11.4 v31.35,11.15
  Bottom 0.152: 26.56,7.63 27.32,7.63 | 27.32,7.63 27.31,7.61 27.31,6.87 27.32,6.87 | 27.32,7.63 27.34,7.64
MOSI  (via drill 0.3)
  Top 0.125: v20.64,15.68 21.14,15.19 24.86,15.19 IC5.31 25.18,15.05 25.56,15.05 27.47,16.96 v27.83,16.96 | v19.76,18.2 17.87,18.2 17.24,17.57 v13.71,17.57
  Bottom 0.125: v20.64,15.68 20.64,15.94 20.14,16.44 20.14,16.97 J3.P3 20.01,17.1 20.01,17.95 v19.76,18.2 | v27.83,16.96 27.83,17.11 28.96,18.24 28.96,19.84 IC2.5 | D4.1 18,1.82 18,1.57 17.74,1.32 13.84,1.32 13.08,2.08 R6.1 13.08,2.2 13.71,2.83 13.96,2.83 15.98,4.85 15.98,6.23 15.55,6.66 15.55,9.7 | 12.45,16.31 10.81,17.95 10.18,17.95 J1.10 | 12.45,16.31 12.45,14.55 11.19,13.29 11.19,11.78 12.6,10.37 15.23,10.37 | 12.45,16.31 v13.71,17.57
  Bottom 0.152: 15.23,10.37 15.38,10.22 15.38,9.87 15.55,9.7
N$1
  Top 0.125: R1-USB.2 13.07,10.1 14.9,8.28 16.58,8.28 16.86,8 16.86,7.49 J2.A5
N$2
  Top 0.125: D1.1 2.25,13.92 4.26,13.92 4.51,14.17 T1.2 4.64,14.3 4.64,14.68 6.78,16.82 10.44,16.82 10.69,17.07 14.85,17.07 15.73,16.19 23.79,16.19 24.67,17.07 26.82,17.07 28.58,18.83 31.98,18.83 | 31.98,18.83 31.98,19.72 | 31.98,18.83 31.98,15.56 32.99,14.55 32.99,12.66 C1_BAT1.1 | 31.98,19.72 31.36,20.34 31.36,21.11 31.48,21.23 31.6,21.23 32.02,21.65 IC1.1 | 31.98,19.72 IC1.3
N$3
  Bottom 0.125: R12.2 13.31,4.82 13.16,4.97 13.16,5.37 12.93,5.6 12.93,8.1 13.27,8.44 R11.1 13.41,9.15 12.39,9.76 12.14,10.01 6.28,10.01 Q1.1
N$4  (via drill 0.3)
  Top 0.125: R6-ESP1.2 4.77,24.13 v4.77,23.5 4.77,21.86 5.4,21.23 6.15,21.23 7.41,19.97 7.41,18.58 SJ2.2 | v7.27,26.13 7.27,27.38 7.69,27.81 R7-ESP1.1
  Bottom 0.125: v7.27,26.13 7.27,24.07 6.69,23.5 v4.77,23.5
N$5
  Top 0.125: R2-USB.1 16.86,9.99 16.86,9.76 18.12,8.5 19.38,8.5 19.89,8 19.89,7.49 J2.B5
N$6  (via drill 0.3)
  Top 0.125: v5.27,22.87 5.52,23.12 5.52,24.88 4.89,25.51 R6-ESP1.1 | v5.27,19.72 5.27,19.09 4.77,18.58 SJ1.1
  Bottom 0.125: v5.27,19.72 v5.27,22.87
N$7  (via drill 0.3)
  Top 0.125: v5.33,26.79 5.71,26.79 7.7,28.79 8.55,28.79 9.05,28.28 9.17,28.28 R1_BAT.1 | v3.05,24.35 3.05,23.82 3.51,23.36 MCP73831.1
  Bottom 0.125: v5.33,26.79 5.33,26.43 3.25,24.35 v3.05,24.35
N$8
  Top 0.125: IC3.1 4.01,12.41 5.27,13.67 5.27,14.93 6.28,15.94 8.42,15.94 C1.1
N$9
  Top 0.125: CHG_LED.C 5.77,22.11 5.77,25.26 5.91,25.4 7.57,25.4 8.34,26.17 8.94,26.17 R1_BAT.2
N$10
  Top 0.125: 4.16,25.36 3.26,26.27 R2_BAT.2
  Top 0.152: 4.16,25.36 4.16,23.3 4.48,22.98 4.48,21.72 4.98,21.22 4.98,20.52 4.61,20.16 4.14,20.16 3.64,20.66 MCP73831.5 3.56,20.64
PIN_LED  (via drill 0.3)
  Top 0.125: v26.69,15.56 25.68,14.55 24.67,14.55 24.17,14.05 IC5.30 | v16.08,10.28 15.23,10.28 v14.91,9.96
  Bottom 0.125: v16.08,10.28 16.23,10.13 16.23,8.5 16.74,8 18.75,8 19,8.25 19,9.18 25.38,15.56 v26.69,15.56 | v14.91,9.96 R11.2
PPG_INT  (via drill 0.3)
  Top 0.125: v26.94,20.85 25.43,19.34 25.18,19.34 IC5.36
  Bottom 0.125: v26.94,20.85 29.34,23.24 TP8.TP
RESET  (via drill 0.3)
  Top 0.125: RESET_BUTTON.4 27.82,6.11 30.34,8.63 RESET_BUTTON.3 v32.23,10.52 | v15.85,12.79 15.22,12.79 14.47,12.03 14.25,12.03 C5.1 | v17.24,12.79 18,12.03 R1-ESP.1 | v26.82,26.39 26.44,26.77 25.18,26.77 IC5.45 25.05,26.9 23.9,25.74 23.9,21.71 19.13,16.94 v17.11,16.94
  Bottom 0.125: v15.85,12.79 v17.24,12.79 18.17,12.79 19.11,13.73 19.11,14.58 | v26.82,26.39 28.71,24.5 30.6,24.5 31.73,23.37 TP9.TP 31.86,23.24 34.59,20.51 34.59,12.37 32.74,10.52 v32.23,10.52 | 17.62,16.04 17.39,16.04 17.11,16.31 v17.11,16.94
  Bottom 0.152: 17.62,16.04 17.96,15.7 17.96,15.5 18.14,15.32 18.88,15.32 19.11,15.09 19.11,14.58
RX  (via drill 0.3)
  Top 0.125: v27.45,26.39 26.94,25.89 26.94,24.38 25.56,22.99 25.43,22.99 25.18,22.74 IC5.40
  Bottom 0.125: v27.45,26.39 28.58,26.39 29.21,25.76 TP11.TP
SCK  (via drill 0.3)
  Top 0.125: v22.91,15.69 23.13,15.48 24.47,15.48 24.8,15.81 25.05,15.81 IC5.32 | v15.48,17.07 16.36,17.07 16.99,16.44 20.04,16.44 v21.78,18.18 21.98,17.97 25.7,17.97 27.57,19.84 v29.71,19.84
  Bottom 0.125: D3.1 30.09,8.88 31.73,10.52 31.73,10.64 32.36,11.27 33.12,11.27 34.23,12.39 34.23,20.37 33.72,20.88 31.26,20.88 30.34,19.97 IC2.6 30.22,19.84 v29.71,19.84 | R5.1 18.5,8.75 18.5,10.36 23.02,14.88 23.02,15.59 v22.91,15.69 22.28,16.33 22.28,16.98 J3.P5 22.46,17.5 v21.78,18.18 | v15.48,17.07 14.22,18.33 10.18,18.33 J1.9
SCL  (via drill 0.3)
  Top 0.125: v8.67,19.72 8.67,21.23 IC4.8 | v9.43,15.94 10.06,16.57 11.07,16.57 IC5.13 | v5.9,14.93 5.52,14.55 5.52,13.54 4.01,12.03 3.25,12.03 IC3.2
  Bottom 0.125: v5.9,14.93 5.9,18.2 7.92,20.22 8.17,20.22 v8.67,19.72 8.67,17.57 9.05,17.2 9.05,16.31 v9.43,15.94 9.43,13.14 12.62,9.95 13.91,9.95 14.32,9.53 | 13.88,6.82 13.88,3.84 12.96,3.84 12.7,4.09 12.7,5.23 10.81,7.12 10.81,7.87 TP6.TP
  Bottom 0.152: 13.88,6.82 13.88,6.86 13.35,7.39 13.35,8.12 13.49,8.26 13.8,8.26 14.32,8.79 14.32,9.53
SDA  (via drill 0.3)
  Top 0.125: v8.04,19.72 7.54,20.22 7.54,21.73 IC4.9 | v8.29,17.32 10.94,17.32 11.07,17.45 IC5.12 11.19,17.45 14.09,20.35 14.09,24.5 13.46,25.13 13.46,26.19 v13.18,26.48 | v7.16,14.39 7.01,14.39 4.15,11.53 3.25,11.53 IC3.3
  Bottom 0.125: v8.04,19.72 8.04,17.57 v8.29,17.32 7.16,16.19 v7.16,14.39 | v13.18,26.48 13.18,26.9 11.17,28.91 | 10.14,31.28 9.65,31.77 8.14,31.77 6.93,30.55 6.8,30.55 TP7.TP
  Bottom 0.152: 10.14,31.28 10.14,29.13 10.36,28.91 11.17,28.91
SS_FLASH  (via drill 0.3)
  Top 0.125: v14.97,11.9 14.97,11.78 14.59,11.4 13.58,11.4 13.46,11.53 13.46,12.57 13.84,12.95 13.84,13.92 IC5.18 | v18.89,12.09 19.3,12.09 20.37,11.03 23.61,11.03 v24.23,10.4
  Bottom 0.125: v18.89,12.09 15.16,12.09 v14.97,11.9 | v24.23,10.4 24.52,10.12 29.44,10.12 31.1,11.78 31.1,12.66 31.28,12.84 32.06,12.84 32.74,12.16 IC2.1
SS_SD  (via drill 0.3, 0.35)
  Top 0.125: v12.58,21.73 11.19,21.73 IC5.7 | v15.48,18.83 15.98,18.33 v17.37,18.33 | v19.38,5.1 19.2,5.28 v15.36,5.28 | 13.27,8.08 11.94,9.41 11.94,9.9 | 14.49,10.79 16.86,13.16 16.86,14.91 17.71,15.77 v18.61,15.77
  Top 0.152: 11.94,9.9 11.6,10.24 11.8,10.45 11.8,10.59 12.09,10.87 12.64,10.87 12.72,10.79 14.49,10.79 | v15.36,5.28 15.27,5.28 | 13.27,8.08 14.26,8.08 v14.32,8.13
  Bottom 0.125: R4.1 21.78,2.08 21.9,2.2 21.9,4.47 D2.1 21.9,4.6 19.89,4.6 v19.38,5.1 | v15.48,18.83 v12.58,21.73 | v17.37,18.33 18,18.33 18.83,17.49 J3.P2 18.79,17.23 18.61,17.05 v18.61,15.77
  Bottom 0.152: v15.36,5.28 15.18,5.28 14.4,6.06 14.39,7.8 | 14.39,7.8 14.39,7.92 | 14.39,7.8 14.32,7.87 v14.32,8.13
SS_TFT  (via drill 0.3)
  Top 0.125: v16.36,15.68 16.36,14.05 IC5.21
  Bottom 0.125: v16.36,15.68 16.36,16.69 15.98,17.07 15.98,17.2 14.34,18.83 10.18,18.83 J1.8
TFT_DC  (via drill 0.3)
  Top 0.125: v17.52,14.91 17.37,14.75 17.37,14.05 IC5.22 | v12.96,15.43 10.56,15.43 v10.06,15.94
  Bottom 0.125: v17.52,14.91 16.59,14.91 16.11,14.42 13.96,14.42 v12.96,15.43 | v10.06,15.94 9.3,16.69 9.3,19.21 9.43,19.34 10.06,19.34 J1.7
TX  (via drill 0.3)
  Top 0.125: v26.31,22.74 25.43,21.86 25.18,21.86 IC5.39
  Bottom 0.125: v26.31,22.74 26.31,26.52 26.82,27.02 30.47,27.02 31.73,25.76 TP12.TP
VBAT  (via drill 0.3)
  Top 0.3: MCP73831.3 1.74,23.25 1.74,22.61 2.93,21.42 2.93,18.78 3.13,18.58 SJ1.2 3.25,18.46 v3.25,16.82 | v6.03,14.05 6.66,14.68 6.66,15.18 T1.3 | v6.78,8 9.18,8 C2_BAT.1
  Bottom 0.3: TP5.TP 8.17,8 v6.78,8 4.77,8 3.63,9.13 3.63,11.8 5.88,14.05 v6.03,14.05 v3.25,16.82
VBUS  (via drill 0.3)
  Top 0.152: 2.32,18.57 2.34,18.55 | 28.02,11.07 28.02,10.59 27.68,10.25 27.68,9.56 C4_USB.1
  Top 0.3: CHG_LED.A 5.77,20.47 5.77,17.32 4.64,16.19 T1.1 4.51,16.06 2.25,16.06 D1.2 2.12,16.06 1.24,16.94 1.24,17.32 C1_BAT.1 1.24,17.45 2.34,18.55 | 24.8,11.2 24.8,11.9 C5_USB.1 24.67,12.03 24.63,12.07 23.59,12.07 v23.56,12.04 23.33,12.28 23.33,12.43 21.29,12.43 21.08,12.21 R1_PWRUSB.2 | 24.8,11.2 24.8,8.8 26.92,8.8 C4_USB.1 | D6.2 29.59,10.52 29.59,10.9 29.24,11.24 29.24,11.43 29.06,11.61 28.56,11.61 28.02,11.07 | PFMF.050.1.2 28.68,15.55 v28.4,15.75 | v1.18,22.34 1.18,22.22 MCP73831.4 1.95,20.66 2.34,20.44 2.49,20.28 2.49,19.58 2.32,19.4 2.32,18.57 | 24.8,11.2 24.93,11.07
  Bottom 0.152: 7.4,29.18 7.38,29.18
  Bottom 0.3: v1.18,22.34 1.86,23.02 1.86,24.75 3.88,26.78 3.88,28.51 4.55,29.18 7.38,29.18 | v23.56,12.04 24.18,12.66 26.77,12.66 28.4,14.29 v28.4,15.75 28.14,15.49 27.93,15.49 26.91,16.51 26.91,17.64 26.47,18.08 22.98,18.08 16.24,24.81 13.6,24.81 12.47,25.94 12.47,27.12 12.32,27.26 10.93,27.26 9.26,28.93 7.64,28.93 7.4,29.18
VIBE_OUT+  (via drill 0.3)
  Top 0.125: v7.54,9.26 6.66,10.14 6.66,11.65 6.91,11.9 7.54,11.9 IC3.9
  Bottom 0.125: v7.54,9.26 8.67,9.26 9.43,8.5 9.43,6.74 8.29,5.6 TP1.TP
VIBE_OUT-  (via drill 0.3)
  Top 0.125: v9.93,6.74 9.93,9.76 8.8,10.9 7.66,10.9 IC3.7
  Bottom 0.125: v9.93,6.74 9.93,6.36 10.69,5.6 TP2.TP
VUSB  (via drill 0.3)
  Top 0.3: J2.A4 15.73,7.37 15.85,7.37 J2.B9 15.98,7.37 15.98,6.65 16.27,6.36 v17.24,6.36 | J2.A9 20.64,7.37 20.52,7.37 J2.B4 20.39,7.37 20.39,6.74 v20.01,6.36 | v32.74,18.08 34.25,16.57 PFMF.050.1.1
  Bottom 0.3: v17.24,6.36 v20.01,6.36 20.01,7.77 24.45,12.21 27.32,12.21 28.86,13.76 33.06,13.76 33.45,14.15 33.45,17.75 33.12,18.08 v32.74,18.08